# EAGLE board 1.0 (EAGLE 6.6.0)
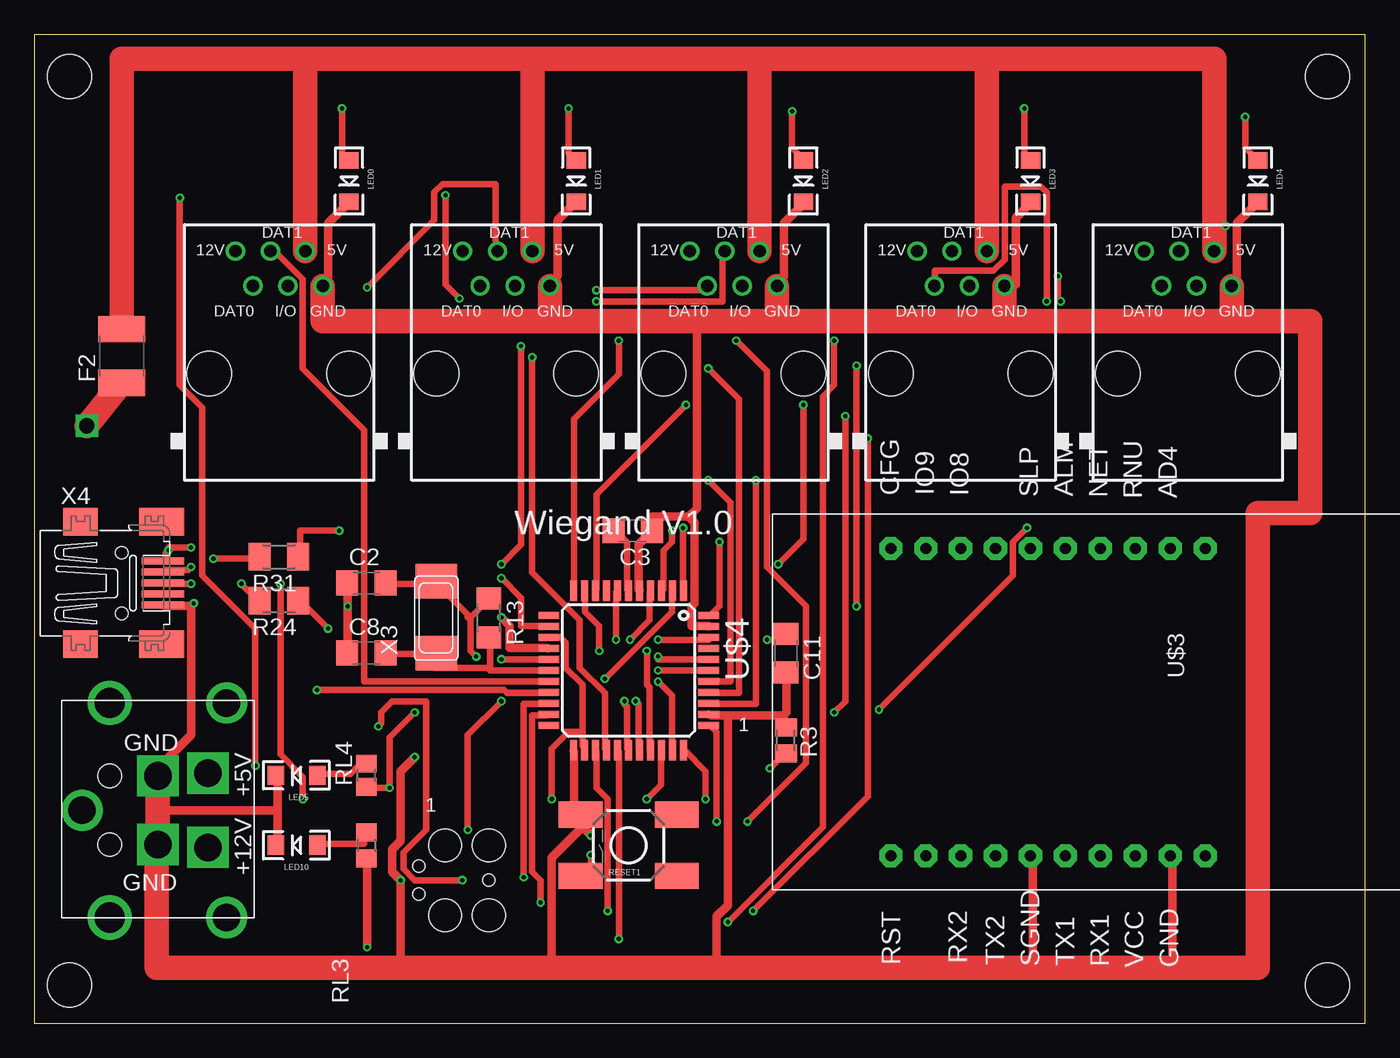
[diagram p0: board, top side]
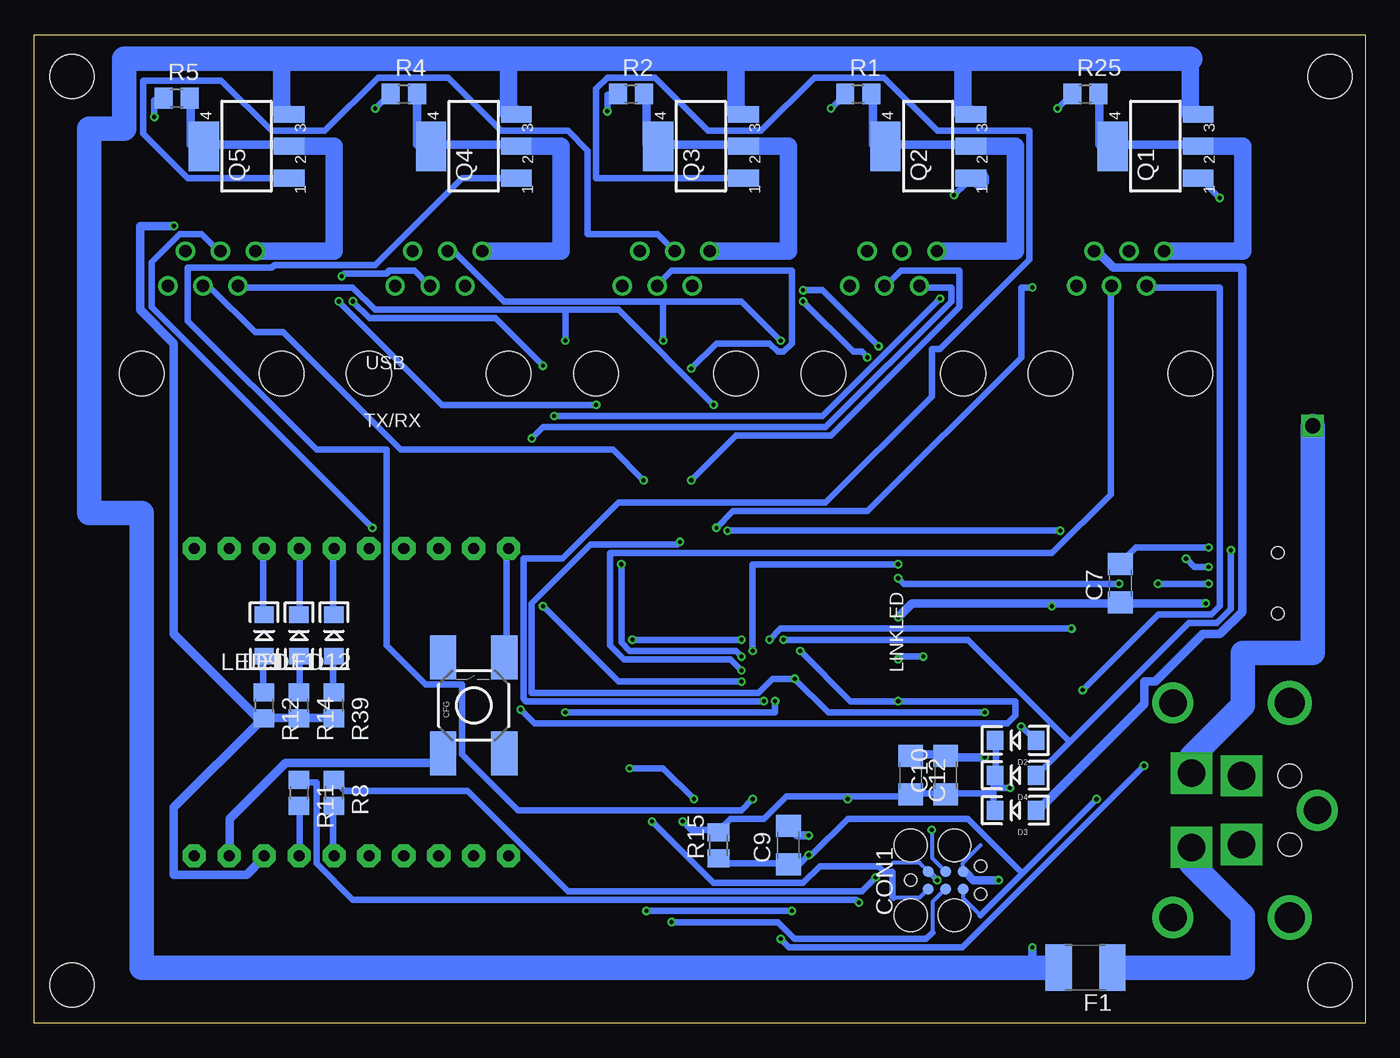
[diagram p1: board, bottom side, seen from below]

Size 96.7 x 71.87 mm. Coordinates in mm from the lower left corner, seen from the top.
Outline: 0,0 96.7,0 96.7,71.87 0,71.87 0,0
Copper layers (1*16): Top 0.035mm / dielectric 1.5mm / Bottom 0.035mm
Design rules "Fusion_eagle_rule_v1.1": minimum track width 6mil, minimum drill 12mil, track to track 6mil, track to pad 6mil, pad to pad 6mil, via to via 6mil, smd to smd 0mil, copper to edge 10mil, drill to drill 10mil, minimum pad ring 10mil, minimum via ring 6mil, stop-mask expansion 2mil, vias tented up to drill 100mil, thermal gap 10mil
Net classes: 0 default: width 0.457 mm; 1 power: width 0.61 mm; 2 VIN: width 0.457 mm; 3 fine: width 0.457 mm; 4 aref: width 0.457 mm
Holes 3.2 mm at 2.54,2.79 2.54,68.83 93.98,68.83 93.98,2.79
bKeepout: area -1.3,54.9 to 114.3,82.8; area -7.6,52.3 to 108,80.3
vRestrict: area 47,23.1 to 62.2,26.9; area 34.3,16.8 to 52.1,23.1; area 34.3,28.2 to 52.1,34.5; area 45.7,16.8 to 52.1,34.5; area 34.3,16.8 to 40.6,34.5

## Footprints (pad centres in the part's own frame; a part is rotated, then mirrored left to right if it is on the bottom)
C1206 = smd 1.6 x 1.8: 1 -1.4,0; 2 1.4,0
TACTILE_SWITCH_SMD = smd 3.175 x 1.905: 1 -3.493,2.223; 2 3.493,2.223; 3 -3.493,-2.223; 4 3.493,-2.223
TC2030-MCP = smd 0.787 x 0.787: 5V 1.27,0.635; GND 3.81,0.635; MISO 1.27,-0.635; MOSI 2.54,0.635; RESET 3.81,-0.635; SCK 2.54,-0.635 | hole 0.889: 0,0; 5.08,-1.016; 5.08,1.016 | hole 2.375: 0,2.54; 0,-2.54; 3.175,-2.54; 3.175,2.54
LED-1206 = smd 1.2 x 1.4: A -1.5,0; C 1.5,0
RJ12-STRAIGHT-WIEGAND = drill 0.9 pad 1.4: +5V 1.905,7.62; +12V -3.175,7.62; DAT0 -1.905,5.08; DAT1 -0.635,7.62; GND 3.175,5.08; I/O 0.635,5.08 | hole 3.251: -5.08,-1.27; 5.08,-1.27
C1812 = smd 1.9 x 3.4: 1 -1.95,0; 2 1.95,0
SOT223 = smd 1.219 x 2.235: 1 -2.311,-3.099; 2 0,-3.099; 3 2.311,-3.099 | smd 3.6 x 2.2: 4 0,3.099
R0805 = smd 1.3 x 1.5: 1 -0.95,0; 2 0.95,0
M0805 = smd 1.3 x 1.6: 1 -0.95,0; 2 0.95,0
R1206 = smd 1.6 x 1.803: 1 -1.422,0; 2 1.422,0
M1206 = smd 1.6 x 2: 1 -1.4,0; 2 1.4,0
R0805' = smd 1.3 x 1.5: 1 -0.85,0; 2 0.85,0
SZ05-ZIGBEE = drill 0.8 pad 1.676 octagon: 6 -11.415,13.971; 7 -11.415,11.431; 11 -11.415,1.271; 12 -11.415,-1.269; 13 -11.415,-3.809; 14 -11.415,-6.349; 17 10.925,-6.349; 18 10.925,-3.809; 19 10.925,-1.269; 25 10.925,13.971; ALM -11.415,3.811; CFG -11.415,-8.889; GND 10.925,11.431; NET -11.415,6.351; RNU -11.415,8.891; RST 10.925,-8.889; RX1 10.925,6.351; SGND 10.925,1.271; TX1 10.925,3.811; VCC 10.925,8.891
TQFP44 = smd 1.5 x 0.5: 1 -5.8,4; 2 -5.8,3.2; 3 -5.8,2.4; 4 -5.8,1.6; 5 -5.8,0.8; 6 -5.8,0; 7 -5.8,-0.8; 8 -5.8,-1.6; 9 -5.8,-2.4; 10 -5.8,-3.2; 11 -5.8,-4; 23 5.8,-4; 24 5.8,-3.2; 25 5.8,-2.4; 26 5.8,-1.6; 27 5.8,-0.8; 28 5.8,0; 29 5.8,0.8; 30 5.8,1.6; 31 5.8,2.4; 32 5.8,3.2; 33 5.8,4 | smd 0.5 x 1.5: 12 -4,-5.8; 13 -3.2,-5.8; 14 -2.4,-5.8; 15 -1.6,-5.8; 16 -0.8,-5.8; 17 0,-5.8; 18 0.8,-5.8; 19 1.6,-5.8; 20 2.4,-5.8; 21 3.2,-5.8; 22 4,-5.8; 34 4,5.8; 35 3.2,5.8; 36 2.4,5.8; 37 1.6,5.8; 38 0.8,5.8; 39 0,5.8; 40 -0.8,5.8; 41 -1.6,5.8; 42 -2.4,5.8; 43 -3.2,5.8; 44 -4,5.8
KPJX-4S-S = drill 2 square: +5V 2.7,1.35; +12V -2.7,1.35; GND1 -2.5,5; GND2 2.5,5 | drill 2: P$1 -7.8,0; P$2 7.8,0; P$11 0,10.5 | drill 2.2: P$3 -7.8,8.5; P$4 7.8,8.5 | hole 1.7: -2.5,8.5; 2.5,8.5
NX6035 = smd 2.5 x 3: P$1 2.665,0; P$2 -2.565,0
32005-201 = smd 3.1 x 0.5: 1 3,1.6; 2 3,0.8; 3 3,0; 4 3,-0.8; 5 3,-1.6 | smd 2.5 x 2: M1 -3,-4.45; M2 -3,4.45 | smd 3.3 x 2: M3 2.9,4.45; M4 2.9,-4.45 | hole 0.9: 0,2.2; 0,-2.2

## Placement (x,y rotation side)
C2  22pF  [C1206]  24.13,32 0 top
C3  100nF  [C1206]  43.5,35.81 180 top
C7  10uF  [C1206]  17.78,32 90 bottom
C8  22pF  [C1206]  24.13,26.92 0 top
C9  100nF  [C1206]  41.91,12.95 90 bottom
C10  10uF  [C1206]  30.48,18.03 90 bottom
C11  100nF  [C1206]  54.61,26.92 270 top
C12  100nF  [C1206]  33.02,18.03 270 bottom
CFG  Configure  [TACTILE_SWITCH_SMD]  64.77,23.11 90 bottom
CON1  SPI  [TC2030-MCP]  33.02,10.41 0 bottom
D2  1N581D1206  [LED-1206]  25.4,20.57 180 bottom
D3  1N581D1206  [LED-1206]  25.4,15.49 180 bottom
D4  1N581D1206  [LED-1206]  25.4,18.03 180 bottom
DOOR0  RJ12  [RJ12-STRAIGHT-WIEGAND]  17.78,48.51 0 top
DOOR1  RJ12  [RJ12-STRAIGHT-WIEGAND]  34.29,48.51 0 top
DOOR2  RJ12  [RJ12-STRAIGHT-WIEGAND]  50.8,48.51 0 top
DOOR3  RJ12  [RJ12-STRAIGHT-WIEGAND]  67.31,48.51 0 top
DOOR4  RJ12  [RJ12-STRAIGHT-WIEGAND]  83.82,48.51 0 top
F1  0.5A  [C1812]  20.32,4.06 180 bottom
F2  0.5A  [C1812]  6.35,48.51 90 top
LED0  Blue  [LED-1206]  22.86,61.21 270 top
LED1  Blue  [LED-1206]  39.37,61.21 270 top
LED2  Blue  [LED-1206]  55.88,61.21 270 top
LED3  Blue  [LED-1206]  72.39,61.21 270 top
LED4  Blue  [LED-1206]  88.9,61.21 270 top
LED5  RED  [LED-1206]  19.05,18.03 180 top
LED9  RED  [LED-1206]  80.01,28.19 90 bottom
LED10  RED  [LED-1206]  19.05,12.95 180 top
LED11  RED  [LED-1206]  77.47,28.19 90 bottom
LED12  RED  [LED-1206]  74.93,28.19 90 bottom
Q1  BCP69  [SOT223]  15.24,63.75 90 bottom
Q2  BCP69  [SOT223]  31.75,63.75 90 bottom
Q3  BCP69  [SOT223]  48.26,63.75 90 bottom
Q4  BCP69  [SOT223]  64.77,63.75 90 bottom
Q5  BCP69  [SOT223]  81.28,63.75 90 bottom
R1  10k  [R0805]  36.83,67.56 0 bottom
R2  10k  [R0805]  53.34,67.56 0 bottom
R3  10k  [M0805]  54.61,20.57 270 top
R4  10k  [R0805]  69.85,67.56 0 bottom
R5  10k  [R0805]  86.36,67.25 0 bottom
R8  1K  [R0805]  74.93,16.76 270 bottom
R11  1K  [R0805]  77.47,16.76 270 bottom
R12  1K  [R0805]  80.01,23.11 270 bottom
R13  1M  [R1206]  33.02,29.46 270 top
R14  1K  [R0805]  77.47,23.11 270 bottom
R15  10k  [M0805]  46.99,12.95 90 bottom
R24  22  [M1206]  17.78,30.73 180 top
R25  10k  [R0805]  20.32,67.56 0 bottom
R31  22  [M1206]  17.78,33.91 180 top
R39  1K  [R0805]  74.93,23.11 270 bottom
RESET1  Reset uC  [TACTILE_SWITCH_SMD]  43.18,12.95 180 top
RL3  1K  [R0805]  24.13,12.95 270 top
RL4  1K  [R0805']  24.13,18.03 90 top
U$3  SZ05-ZIGBEE  [SZ05-ZIGBEE]  71.12,23.11 270 top
U$4  ATMEGA32U4-AU  [TQFP44]  43.18,25.65 270 top
U$6  KPJX-4S-S  [KPJX-4S-S]  13.97,15.49 90 top
X3  16MHz  [NX6035]  29.21,29.46 90 top
X4  MINI-USB  [32005-201]  6.35,32 0 top

## Library data of the parts
C2 C3 C7-C12 R1 R2 R4 R5 R8 R11-R14 R25 R39 RL3 = rcl
CFG CON1 D2-D4 DOOR0 DOOR1-DOOR4 F1 F2 RESET1 U$3 U$6 X3 = lpatiny
LED0 LED1-LED5 LED9-LED12 = SparkFun
Q1-Q5 = zetex; MPN: DJT4030P-13; OC_FARNELL: 1710675; OC_NEWARK: 25R4489
R3 R15 R24 R31 RL4 = resistor
U$4 = adafruit
X4 = con-cypressindustries; OC_FARNELL: unknown; OC_NEWARK: unknown

## Nets
+5V [power]: D3.A DOOR0.+5V DOOR1.+5V DOOR2.+5V DOOR3.+5V DOOR4.+5V F2.2 R12.2 R14.2 R39.2 U$3.VCC
+5V/1 [fine]: C10.1 C12.2 D2.C D3.C D4.C R15.2 RL4.1 U$4.2 U$4.14 U$4.24 U$4.34 U$4.44
+12V [power]: F1.2 Q1.3 Q2.3 Q3.3 Q4.3 Q5.3 RL3.2
A0: DOOR4.I/O U$4.36
A1: DOOR2.I/O U$4.37
A2: DOOR1.I/O U$4.38
A3: DOOR0.I/O U$4.39
A4: DOOR3.I/O U$4.40
A5: U$4.41
AREF: C11.1 U$4.42
CS: DOOR1.DAT0 U$4.25
D2*: DOOR0.DAT0 U$4.19
D3*: DOOR0.DAT1 U$4.18
D5*: Q4.1 U$4.31
D6*: Q1.1 U$4.27
D7*: DOOR1.DAT1 U$4.1
D8*: Q2.1 U$4.28
D9*: Q3.1 U$4.29
D10*: DOOR2.DAT0 U$4.30
D11*: U$4.12
D12*: DOOR2.DAT1 Q5.1 U$4.26
D13*: DOOR3.DAT0 U$4.32
D+USB: R24.2 X4.3
D-USB: R31.2 X4.2
GND [power]: C2.1 C3.1 C7.1 C8.1 C9.2 C10.2 C11.2 C12.1 CFG.1 CON1.GND DOOR0.GND DOOR1.GND DOOR2.GND DOOR3.GND DOOR4.GND LED0.C LED1.C LED2.C LED3.C LED4.C LED5.C LED10.C R3.1 RESET1.4 U$3.GND U$3.SGND U$4.5 U$4.15 U$4.23 U$4.35 U$4.43 U$6.GND1 U$6.GND2 X4.5
GND1 [VIN]: LED9.C U$3.RNU
GND2 [VIN]: LED11.C U$3.NET
GND3 [VIN]: LED12.C U$3.ALM
HWB: R3.2 U$4.33
ISP+5V: CON1.5V D2.A
MISO: CON1.MISO DOOR3.DAT1 U$4.11
MOSI: CON1.MOSI DOOR4.DAT1 U$4.10
N$1: LED1.A R1.1
N$3 [power]: DOOR1.+12V Q2.2 Q2.4 R1.2
N$5: LED2.A R2.1
N$7 [power]: DOOR2.+12V Q3.2 Q3.4 R2.2
N$11: R11.2 U$3.RX1
N$12: LED5.A RL4.2
N$16: C3.2 U$4.6
N$17: LED0.A R25.1
N$19: LED3.A R4.1
N$22 [power]: DOOR3.+12V Q4.2 Q4.4 R4.2
N$23 [power]: DOOR0.+12V Q1.2 Q1.4 R25.2
N$24: R8.2 U$3.TX1
N$25: LED9.A R12.1
N$26: LED11.A R14.1
N$27: LED12.A R39.1
N$29: LED4.A R5.1
N$31 [power]: DOOR4.+12V Q5.2 Q5.4 R5.2
N$35: CFG.4 U$3.CFG
N$38: F2.1 U$6.+5V
N$39: F1.1 U$6.+12V
N$42: C8.2 R13.2 U$4.17 X3.P$2
N$75: LED10.A RL3.1
RD+: R24.1 U$4.4
RD-: R31.1 U$4.3
RESET: C9.1 CON1.RESET R15.1 RESET1.2 U$4.13
RX: R8.1 U$4.20
RXLED: U$4.8
SCK: CON1.SCK DOOR4.DAT0 U$4.9
TX: R11.1 U$4.21
TXLED: U$4.22
VUSB: C7.2 D4.A U$4.7 X4.1
XTAL1: C2.2 R13.1 U$4.16 X3.P$1

## Tracks (layer width: path | path; a pad name or v marks a point on that pad's centre or on a via)
3.3V
  Top 0.457: 8.84,8.33 8.64,8.13
+5V  (via drill 0.3)
  Top 0.61: v86.56,57.96 85.72,57.96
  Top 1.778: F2.2 6.35,70.1 19.68,70.1 | 19.68,70.1 36.2,70.1 | 36.2,70.1 52.7,70.1 | 52.7,70.1 69.22,70.1 | 69.22,70.1 85.72,70.1 85.72,57.96 DOOR4.+5V | DOOR0.+5V 19.68,70.1 | DOOR1.+5V 36.2,70.1 | DOOR2.+5V 52.7,70.1 | DOOR3.+5V 69.22,70.1
  Bottom 0.61: R39.2 74.98,22.2 77.42,22.2 R14.2 77.62,22.2 79.86,22.2 R12.2 | R12.2 80.26,22 86.56,15.7 86.56,10.82 81.28,10.82 80.06,12.04 U$3.VCC | D3.A 23.77,15.49 16.05,23.22 16.05,24.84 15.24,24.84 11.79,28.3 10.57,28.3 8.94,29.92 8.94,54.91 18.29,54.91 19.51,56.13 DOOR0.+5V | v86.56,57.96 89,57.96 89,51.87 86.56,49.43 86.56,28.3 80.47,22.2 R12.2
+5V/1  (via drill 0.3)
  Top 0.457: 39.83,21.18 39.83,24.64 38.61,25.86 38.61,27.69 38.2,28.09 37.39,28.09 U$4.14 | 39.83,21.18 39.83,20.17 40.03,19.96 U$4.24 | v49.58,14.68 49.58,21.18 49.17,21.59 U$4.34 | RL4.1 24.18,17.12 v25.81,17.12 25.81,20.78 v27.64,22.61 | v41.45,25.04 46.33,29.92 46.33,31.34 U$4.2 | v49.78,35 49.78,30.33 49.17,29.72 U$4.44 | 39.83,21.18 38.61,21.18 38.61,20.98 37.59,19.96 v37.59,16.31
  Bottom 0.457: v49.58,14.68 48.97,14.07 47.14,14.07 R15.2 46.94,14.07 46.13,14.88 43.69,14.88 42.06,16.51 37.59,16.51 | 27.03,17.12 27.03,17.93 D4.C 26.82,18.14 26.82,20.57 D2.C | 27.03,17.12 27.03,16.71 | 27.03,16.71 27.03,15.49 D3.C | 27.03,17.12 v25.81,17.12 | v27.64,22.61 39.01,22.61 v41.45,25.04 43.08,25.04 44.09,24.03 60.55,24.03 60.55,30.53 56.29,34.8 49.99,34.8 v49.78,35 | 27.03,16.71 30.28,16.71 C10.1 30.48,16.71 32.92,16.71 C12.2 33.12,16.51 37.59,16.51 | v37.59,16.31 37.59,16.51
+12V  (via drill 0.3)
  Top 0.61: v24.18,5.54 24.18,11.84 RL3.2
  Bottom 0.61: v24.18,5.54 24.18,4.06
  Bottom 1.27: Q1.3 12.7,66.07 12.7,70.1 | Q2.3 29.21,66.07 29.21,70.1 | Q3.3 45.72,66.07 45.72,70.1 | Q4.3 62.23,66.07 62.23,70.1 | Q5.3 78.74,66.07 78.74,70.1
  Bottom 1.778: F1.2 24.18,4.06 88.9,4.06 88.9,37.08 92.71,37.08 92.71,65.02 90.17,65.02 90.17,70.1 78.74,70.1 62.23,70.1 45.72,70.1 29.21,70.1 12.7,70.1
A0  (via drill 0.3)
  Top 0.457: v52.43,39.47 52.43,23.22 49.17,23.22 U$4.36
  Bottom 0.457: v52.43,39.47 54.66,41.71 70.1,41.71 78.64,50.24 80.67,50.24 83.92,53.49 84.33,53.49 DOOR4.I/O
A1  (via drill 0.3)
  Top 0.457: v48.97,47.6 51.21,45.36 51.21,24.03 49.17,24.03 U$4.37
  Bottom 0.457: v48.97,47.6 47.14,49.43 43.28,49.43 42.67,48.82 42.27,48.82 41.66,49.43 41.66,54.71 50.39,54.71 51.41,53.7 DOOR2.I/O
A2  (via drill 0.3)
  Top 0.457: v48.97,39.47 50.6,37.85 50.6,24.84 49.17,24.84 U$4.38
  Bottom 0.457: v48.97,39.47 45.72,42.72 38.81,42.72 29.46,52.07 29.46,54.71 33.73,54.71 34.75,53.7 DOOR1.I/O
A3  (via drill 0.3)
  Top 0.457: v45.31,25.65 U$4.39
  Bottom 0.457: v45.31,25.65 46.13,26.47 53.85,26.47 54.86,27.48 54.86,34.19 22.76,34.19 18.49,38.46 18.49,53.49 DOOR0.I/O
A4  (via drill 0.3)
  Top 0.457: v45.31,26.67 45.31,26.47 48.97,26.47 U$4.40 | v54.05,33.38 55.88,35.2 v55.88,44.96 | v74.57,52.48 74.37,52.68 v74.37,54.3
  Bottom 0.457: v45.31,26.67 45.72,27.08 53.44,27.08 54.05,27.69 v54.05,33.38 | v55.88,44.96 67.06,44.96 v74.57,52.48 | v74.37,54.3 74.17,54.51 71.12,54.51 70.92,54.71 69.09,54.71 68.07,53.7 DOOR3.I/O
AREF  (via drill 0.3)
  Top 0.457: v45.31,27.89 48.97,27.89 U$4.42 | v53.24,27.89 54.46,27.89 54.46,28.3 C11.1
  Bottom 0.457: v53.24,27.89 v45.31,27.89
CS  (via drill 0.3)
  Top 0.457: v41.66,8.18 41.66,16.31 40.84,17.12 40.84,19.76 U$4.25 | v52.22,8.18 60.55,16.51 v60.55,42.52
  Bottom 0.457: v52.22,8.18 v41.66,8.18 | v60.55,42.52 59.74,43.33 39.22,43.33 30.07,52.48 30.07,53.49 32.31,53.49 DOOR1.DAT0
D2*  (via drill 0.3)
  Top 0.457: v20.52,24.23 34.14,24.23 34.34,24.03 37.19,24.03 U$4.19
  Bottom 0.457: v20.52,24.23 15.04,29.72 11.18,29.72 10.57,30.33 10.57,53.49 15.85,53.49 DOOR0.DAT0
D3*
  Top 0.457: DOOR0.DAT1 17.48,56.13 19.51,54.1 19.51,47.6 23.98,43.13 23.98,24.84 37.19,24.84 U$4.18
D5*  (via drill 0.3)
  Top 0.457: v44.5,16.31 45.52,17.32 45.52,19.76 U$4.31
  Bottom 0.457: v44.5,16.31 45.31,15.49 61.57,15.49 65.63,19.56 65.63,24.64 68.28,24.64 71.12,27.48 71.12,41.71 76.2,41.71 85.55,51.05 85.55,54.91 79.45,54.91 79.25,55.12 71.93,55.12 65.63,61.42 61.77,61.42 Q4.1
D6*  (via drill 0.3)
  Top 0.457: v42.47,6.15 42.47,19.76 U$4.27 | v16.05,18.75 16.05,28.7 12.19,32.56 12.19,44.75 10.57,46.38 v10.57,59.99
  Bottom 0.457: v42.47,6.15 41.86,5.54 29.26,5.54 v16.05,18.75 | v10.57,59.99 11.99,61.42 Q1.1
D7*  (via drill 0.3)
  Top 0.457: v47.14,36.02 47.14,31.55 U$4.1 | v24.18,53.49 29.06,58.37 29.06,60.4 29.67,61.01 33.53,61.01 33.53,56.13 DOOR1.DAT1
  Bottom 0.457: v47.14,36.02 45.92,37.24 36.17,37.24 24.99,48.41 24.99,53.49 v24.18,53.49
D8*  (via drill 0.3)
  Top 0.457: v42.88,23.42 42.88,23.22 43.08,23.01 43.08,19.96 U$4.28 | v58.12,22.61 58.93,23.42 v58.93,44.14 | v30.89,52.68 29.87,53.7 v29.87,60.2
  Bottom 0.457: v42.88,23.42 42.88,22.61 v58.12,22.61 | v58.93,44.14 39.42,44.14 v30.89,52.68 | v29.87,60.2 29.06,61.01 Q2.1
  Bottom 1.27: Q2.1 27.94,61.44 27.94,61.21
D9*  (via drill 0.3)
  Top 0.457: v43.69,23.42 43.89,23.22 43.89,19.96 U$4.29
  Bottom 0.457: v43.69,23.42 60.96,23.42 61.16,23.62 61.16,33.78 58.32,33.78 54.25,37.85 39.22,37.85 31.5,45.57 31.5,49.02 30.89,49.02 24.38,55.52 24.38,64.87 31.09,64.87 34.95,68.73 40.03,68.73 43.89,64.87 47.75,64.87 51.61,68.73 55.07,68.73 55.88,67.92 55.88,61.42 45.31,61.42 Q3.1
D10*  (via drill 0.3)
  Top 0.457: v44.5,27.08 44.5,24.64 44.7,24.44 44.7,19.96 U$4.30 | v33.93,33.38 35.36,34.8 v35.36,49.22 | v40.84,53.29 48.77,53.29 48.77,53.49 DOOR2.DAT0
  Bottom 0.457: v44.5,27.08 44.5,33.38 v33.93,33.38 | v35.36,49.22 39.42,53.29 v40.84,53.29
D12*  (via drill 0.3)
  Top 0.457: v36.17,48.41 36.17,32.77 39.62,29.31 39.62,25.86 41.45,24.03 41.45,19.96 U$4.26 | v40.84,52.48 49.99,52.48 49.99,56.13 DOOR2.DAT1
  Bottom 0.457: v36.17,48.41 36.58,48.82 37.19,48.82 v40.84,52.48 | Q5.1 78.23,61.42 85.55,61.42 88.8,64.67 88.8,68.53 83.11,68.53 79.45,64.87 75.59,64.87 71.73,68.73 66.65,68.73 62.79,64.87 57.91,64.87 56.49,63.45 56.49,57.35 51.41,57.35 50.19,56.13 DOOR2.DAT1
D13*  (via drill 0.3)
  Top 0.457: v45.31,24.84 46.33,23.83 46.33,19.96 U$4.32 | v59.74,47.8 v59.74,30.33 | v73.56,52.48 73.56,60.4 73.15,60.81 70.51,60.81 70.51,55.52 69.7,54.71 65.43,54.71 65.43,53.7 DOOR3.DAT0
  Bottom 0.457: v45.31,24.84 54.25,24.84 v59.74,30.33 | v59.74,47.8 63.2,51.26 72.34,51.26 v73.56,52.48
D+USB  (via drill 0.3)
  Top 0.457: v15.04,31.95 16.26,30.73 R24.2 | v11.38,31.95 9.55,31.95 X4.3
  Bottom 0.457: v11.38,31.95 v15.04,31.95
D-USB  (via drill 0.3)
  Top 0.457: v13.01,33.78 16.26,33.78 R31.2 | v11.38,33.17 11.18,32.97 9.55,32.97 X4.2
  Bottom 0.457: v13.01,33.78 12.39,33.17 v11.38,33.17
GND  (via drill 0.3)
  Top 0.457: 9.2,18.85 U$6.GND2
  Top 0.61: C8.1 22.76,27.08 v22.76,30.33 22.76,31.95 C2.1 | v33.93,29.52 34.54,28.91 34.54,27.28 37.19,27.28 U$4.15 | 47.55,36.83 47.95,36.42 47.95,30.53 47.75,30.33 47.75,28.91 48.97,28.91 U$4.43 | 47.55,36.83 44.91,36.83 C3.1 44.7,35.61 43.89,34.8 43.89,31.55 U$4.5 | 54.46,22.4 50.39,22.4 | 50.39,22.4 49.17,22.4 U$4.35 | 54.46,22.4 54.46,21.59 R3.1 | C11.2 54.66,25.45 54.66,22.61 54.46,22.4 | U$4.23 39.22,19.76 39.22,15.7 39.62,15.29 RESET1.4 39.62,14.88 39.62,14.48 39.83,14.28 | 39.83,14.28 v40.44,13.66 | 17.68,15.49 17.68,17.93 LED5.C | 17.68,15.49 17.68,13.06 LED10.C | LED0.C 22.76,59.59 21.34,58.17 21.34,54.3 DOOR0.GND | LED1.C 39.22,59.59 38,58.37 38,54.3 DOOR1.GND | LED2.C 55.88,59.59 54.46,58.17 54.46,54.3 DOOR2.GND | LED3.C 72.34,59.59 71.32,58.57 71.32,53.7 DOOR3.GND | LED4.C 88.8,59.59 87.38,58.17 87.38,54.3 DOOR4.GND | 26.62,4.06 v26.62,10.41 26.01,11.02 26.01,12.65 26.62,13.26 26.62,18.34 v27.64,19.36 | 8.97,15.49 17.68,15.49 | 11.38,30.33 9.55,30.33 X4.5 | 11.38,30.33 11.38,20.98 9.35,18.95 U$6.GND2 | 72.54,4.06 72.54,12.04 U$3.SGND | 39.83,14.28 37.59,12.04 37.59,4.06 | 50.39,22.4 50.39,8.58 49.58,7.77 49.58,4.06 | 47.55,36.83 48.16,37.44 48.16,51.05 | v11.58,30.53 11.38,30.33 | 82.7,4.06 82.7,12.04 U$3.GND
  Top 1.778: 87,51.05 70.48,51.05 | 70.48,51.05 53.98,51.05 | 53.98,51.05 48.16,51.05 37.47,51.05 | 37.47,51.05 20.95,51.05 DOOR0.GND | U$6.GND2 8.97,15.49 U$6.GND1 8.89,12.91 8.89,4.06 26.62,4.06 37.59,4.06 49.58,4.06 72.54,4.06 82.7,4.06 88.9,4.06 88.9,37.08 92.71,37.08 92.71,51.05 87,51.05 | DOOR1.GND 37.47,51.05 | DOOR2.GND 53.98,51.05 | DOOR3.GND 70.48,51.05 | DOOR4.GND 87,51.05
  Bottom 0.305: CON1.GND 29.21,11.68 27.94,12.95
  Bottom 0.61: CFG.1 67.67,18.95 78.44,18.95 82.5,14.88 82.5,12.24 U$3.GND | v33.93,29.52 32.92,30.53 22.76,30.53 | 22.76,30.53 17.88,30.53 C7.1 17.68,30.53 v11.58,30.53 | v22.76,30.33 22.76,30.53 | v40.44,13.66 41.25,13.66 41.86,14.28 C9.2 | C12.1 32.92,19.56 30.48,19.56 C10.2 30.28,19.36 v27.64,19.36 | v26.62,10.41 28.45,10.41 29.06,11.02 CON1.GND
GND1
  Bottom 0.457: LED9.C 80.06,29.72 80.06,34.39 U$3.RNU
GND2
  Bottom 0.457: LED11.C 77.42,29.72 77.42,34.39 U$3.NET
GND3
  Bottom 0.457: LED12.C 74.98,29.72 74.98,34.39 U$3.ALM
HWB  (via drill 0.3)
  Top 0.457: v48.77,16.31 48.77,18.34 47.35,19.76 U$4.33 | v53.44,18.54 54.46,19.56 R3.2
  Bottom 0.457: v48.77,16.31 51,18.54 v53.44,18.54
ISP+5V  (via drill 0.3)
  Top 0.457: v24.99,21.59 25.2,21.79 25.2,22.61 26.01,23.42 28.45,23.42 28.45,14.07 26.82,12.45 26.82,11.23 27.64,10.41 v31.09,10.41
  Bottom 0.305: CON1.5V 32.38,11.68 34.29,11.68
  Bottom 0.457: v24.99,21.59 23.98,20.57 D2.A | v31.09,10.41 31.7,11.02 CON1.5V
MISO  (via drill 0.3)
  Top 0.457: v42.47,49.63 42.47,47.19 39.22,43.94 39.22,31.55 U$4.11 | v51.82,14.68 56.08,18.95 56.08,30.33 53.24,33.17 53.24,47.4 v51,49.63
  Bottom 0.305: CON1.MISO 32.38,9.14 34.29,9.14
  Bottom 0.457: v42.47,49.63 45.31,52.48 51,52.48 | 51,52.48 62.59,52.48 66.24,56.13 DOOR3.DAT1 | v51.82,14.68 47.35,10.21 40.84,10.21 39.62,11.43 35.36,11.43 34.95,11.02 34.34,11.02 34.34,9.2 34.29,9.14 | 51,52.48 v51,49.63
MOSI  (via drill 0.3)
  Top 0.457: v41.05,27.08 41.05,28.91 40.03,29.92 40.03,31.34 U$4.10 | v33.93,23.42 31.5,20.98 v31.5,14.07 | v72.14,36.02 71.12,35 71.12,32.56 v61.37,22.81
  Bottom 0.305: CON1.MOSI 31.43,12 31.43,14.07 31.43,14.22
  Bottom 0.457: v41.05,27.08 37.39,23.42 v33.93,23.42 25.4,23.42 25.4,22.4 26.01,21.79 60.35,21.79 v61.37,22.81 | v31.5,14.07 31.43,14.07 | v72.14,36.02 88.19,52.07 88.19,55.32 86.16,57.35 84.53,57.35 83.31,56.13 DOOR4.DAT1
N$1  (via drill 0.3)
  Top 0.457: v38.81,66.5 38.81,63.25 39.22,62.84 LED1.A
  Bottom 0.457: v38.81,66.5 37.8,67.51 R1.1
N$3
  Bottom 0.61: R1.2 35.76,67.51 35.76,63.86 34.95,63.86 Q2.4 34.75,63.86 29.26,63.86 Q2.2
  Bottom 1.27: Q2.2 25.4,63.75 25.4,56.13 DOOR1.+12V
N$5  (via drill 0.3)
  Top 0.457: v55.07,66.29 55.07,63.65 55.88,62.84 LED2.A
  Bottom 0.457: v55.07,66.29 55.07,67.51 54.46,67.51 R2.1
N$7
  Bottom 0.61: R2.2 52.22,67.51 52.22,63.86 51.41,63.86 Q3.4 51.21,63.86 45.72,63.86 Q3.2
  Bottom 1.27: Q3.2 41.91,63.75 41.91,56.13 DOOR2.+12V
N$11
  Bottom 0.457: R11.2 77.42,15.7 77.42,12.24 U$3.RX1
N$12
  Top 0.457: LED5.A 20.73,18.14 22.96,18.14 23.57,18.75 23.98,18.75 RL4.2
N$16
  Top 0.457: U$4.6 43.08,31.55 43.08,35 42.27,35.81 C3.2
N$17  (via drill 0.3)
  Top 0.457: v22.35,66.5 22.35,63.25 22.76,62.84 LED0.A
  Bottom 0.457: v22.35,66.5 21.34,67.51 R25.1
N$19  (via drill 0.3)
  Top 0.457: v71.93,66.5 71.93,63.25 72.34,62.84 LED3.A
  Bottom 0.457: v71.93,66.5 70.92,67.51 R4.1
N$22
  Bottom 0.61: R4.2 68.89,67.51 68.89,63.86 68.07,63.86 Q4.4 67.67,63.86 62.18,63.86 Q4.2
  Bottom 1.27: Q4.2 58.42,63.75 58.42,56.13 DOOR3.+12V
N$23
  Bottom 0.61: R25.2 19.3,67.51 19.3,63.86 18.49,63.86 Q1.4 18.09,63.86 12.6,63.86 Q1.2
  Bottom 1.27: Q1.2 8.89,63.75 8.89,56.13 DOOR0.+12V
N$24
  Bottom 0.457: R8.2 74.98,15.7 74.98,12.24 U$3.TX1
N$25
  Bottom 0.457: LED9.A 80.06,26.67 80.06,24.23 R12.1
N$26
  Bottom 0.457: LED11.A 77.42,26.67 77.42,24.23 R14.1
N$27
  Bottom 0.457: LED12.A 74.98,26.67 74.98,24.23 R39.1
N$29  (via drill 0.3)
  Top 0.457: v87.99,65.89 87.99,63.65 88.8,62.84 LED4.A
  Bottom 0.457: v87.99,65.89 87.99,67.11 87.38,67.11 R5.1
N$31
  Bottom 0.61: R5.2 85.34,67.11 85.34,63.86 84.53,63.86 Q5.4 84.12,63.86 78.64,63.86 Q5.2
  Bottom 1.27: Q5.2 74.93,63.75 74.93,56.13 DOOR4.+12V
N$35
  Bottom 0.457: CFG.4 62.38,26.67 62.38,34.39 U$3.CFG
N$38  (via drill 1.1)
  Top 1.778: v3.81,43.43 F2.1
  Bottom 1.778: U$6.+5V 12.62,19.38 8.89,23.11 8.89,26.92 3.81,26.92 v3.81,43.43
N$39
  Bottom 1.778: U$6.+12V 12.62,11.6 8.89,7.87 8.89,4.06 F1.1
N$42
  Top 0.457: U$4.17 33.12,25.65 33.12,25.86 | 33.12,25.86 33.12,27.89 R13.2 | C8.2 25.6,26.87 29.06,26.87 X3.P$2 29.06,26.67 29.06,25.86 33.12,25.86
N$75
  Top 0.457: LED10.A 20.73,13.06 23.98,13.06 23.98,13.87 RL3.1
RD+  (via drill 0.3)
  Top 0.457: v43.28,27.89 44.7,29.31 44.7,31.34 U$4.4 | v21.34,28.7 19.3,30.73 R24.1
  Bottom 0.457: v43.28,27.89 42.47,28.7 v21.34,28.7
RD-  (via drill 0.3)
  Top 0.457: v46.33,35.81 46.33,35 45.72,34.39 45.72,31.55 U$4.3 | v22.15,35.81 19.3,35.81 19.3,33.98 R31.1
  Bottom 0.457: v22.15,35.81 v46.33,35.81
RESET  (via drill 0.3)
  Top 0.457: v40.44,12.24 40.44,11.43 39.83,10.82 RESET1.2 | v33.93,32.36 35.36,30.94 35.36,28.91 37.19,28.91 U$4.13 | v17.88,31.95 17.88,19.56 19.51,17.93 v19.51,16.31
  Bottom 0.305: CON1.RESET 29.21,9.14 27.94,7.87
  Bottom 0.457: R15.1 46.94,11.84 46.74,11.63 42.06,11.63 C9.1 41.86,11.63 41.05,11.63 v40.44,12.24 40.23,12.24 37.59,14.88 28.85,14.88 24.89,10.92 | v33.93,32.36 33.53,31.95 v17.88,31.95 | 27.94,7.87 24.89,10.92 | 24.89,10.92 v19.51,16.31
RX  (via drill 0.3)
  Top 0.457: v35.56,10.62 35.56,23.22 37.19,23.22 U$4.20
  Bottom 0.457: v35.56,10.62 36.58,9.6 57.91,9.6 65.23,16.92 74.17,16.92 74.78,17.53 R8.1
SCK  (via drill 0.3)
  Top 0.457: v47.35,44.96 40.84,38.46 40.84,31.55 U$4.9 | v50.39,7.37 57.3,14.28 57.3,45.57 58.12,46.38 v58.12,49.63
  Bottom 0.305: CON1.SCK 31.43,8.83 31.43,6.6
  Bottom 0.457: v47.35,44.96 54.25,51.87 58.12,51.87 | 58.12,51.87 71.93,51.87 73.56,53.49 81.89,53.49 DOOR4.DAT0 | v50.39,7.37 42.67,7.37 41.45,6.15 31.9,6.15 31.5,6.55 31.43,6.6 | 58.12,51.87 v58.12,49.63
TX  (via drill 0.3)
  Top 0.457: v36.78,8.79 36.78,10.41 36.17,11.02 36.17,22.4 37.19,22.4 U$4.21
  Bottom 0.457: v36.78,8.79 36.98,8.99 73.56,8.99 76.2,11.63 76.2,17.53 77.42,17.53 R11.1
VUSB  (via drill 0.3)
  Top 0.457: X4.1 9.55,33.78 9.55,34.19 v9.75,34.39 9.75,34.59 v11.38,34.59 | v42.27,27.89 42.27,31.34 U$4.7
  Bottom 0.457: 21.44,20.47 12.8,29.11 10.77,29.11 9.75,30.12 v9.75,34.39 | 21.44,20.47 23.77,18.14 D4.A | v42.27,27.89 28.85,27.89 21.44,20.47 | v11.38,34.59 16.66,34.59 17.68,33.58 C7.2
XTAL1  (via drill 0.3)
  Top 0.457: C2.2 25.6,31.95 29.06,31.95 X3.P$1 29.26,31.95 31.5,29.72 31.5,29.52 31.7,29.52 | v33.93,26.47 37.19,26.47 U$4.16 | v32.11,26.67 31.7,27.08 31.7,29.52 | 31.7,29.52 32.92,30.73 R13.1
  Bottom 0.457: v33.93,26.47 33.73,26.67 v32.11,26.67

## Text on the board
tNames: Wiegand V1.0 | 1 | 1
bNames: USB | TX/RX | LINKLED
203bmp: C:/Users/G/Pictures/logo_epfl.bmp